# Altium PCB Candunio.PcbDoc
Units mm, origin at the board's own origin, x right, y up, seen from the top; angles counter-clockwise.
Board outline 40 x 28.6 mm, 2 copper layers (Top Layer, Bottom Layer); 45 components, 54 nets, 213 pads, 106 vias.
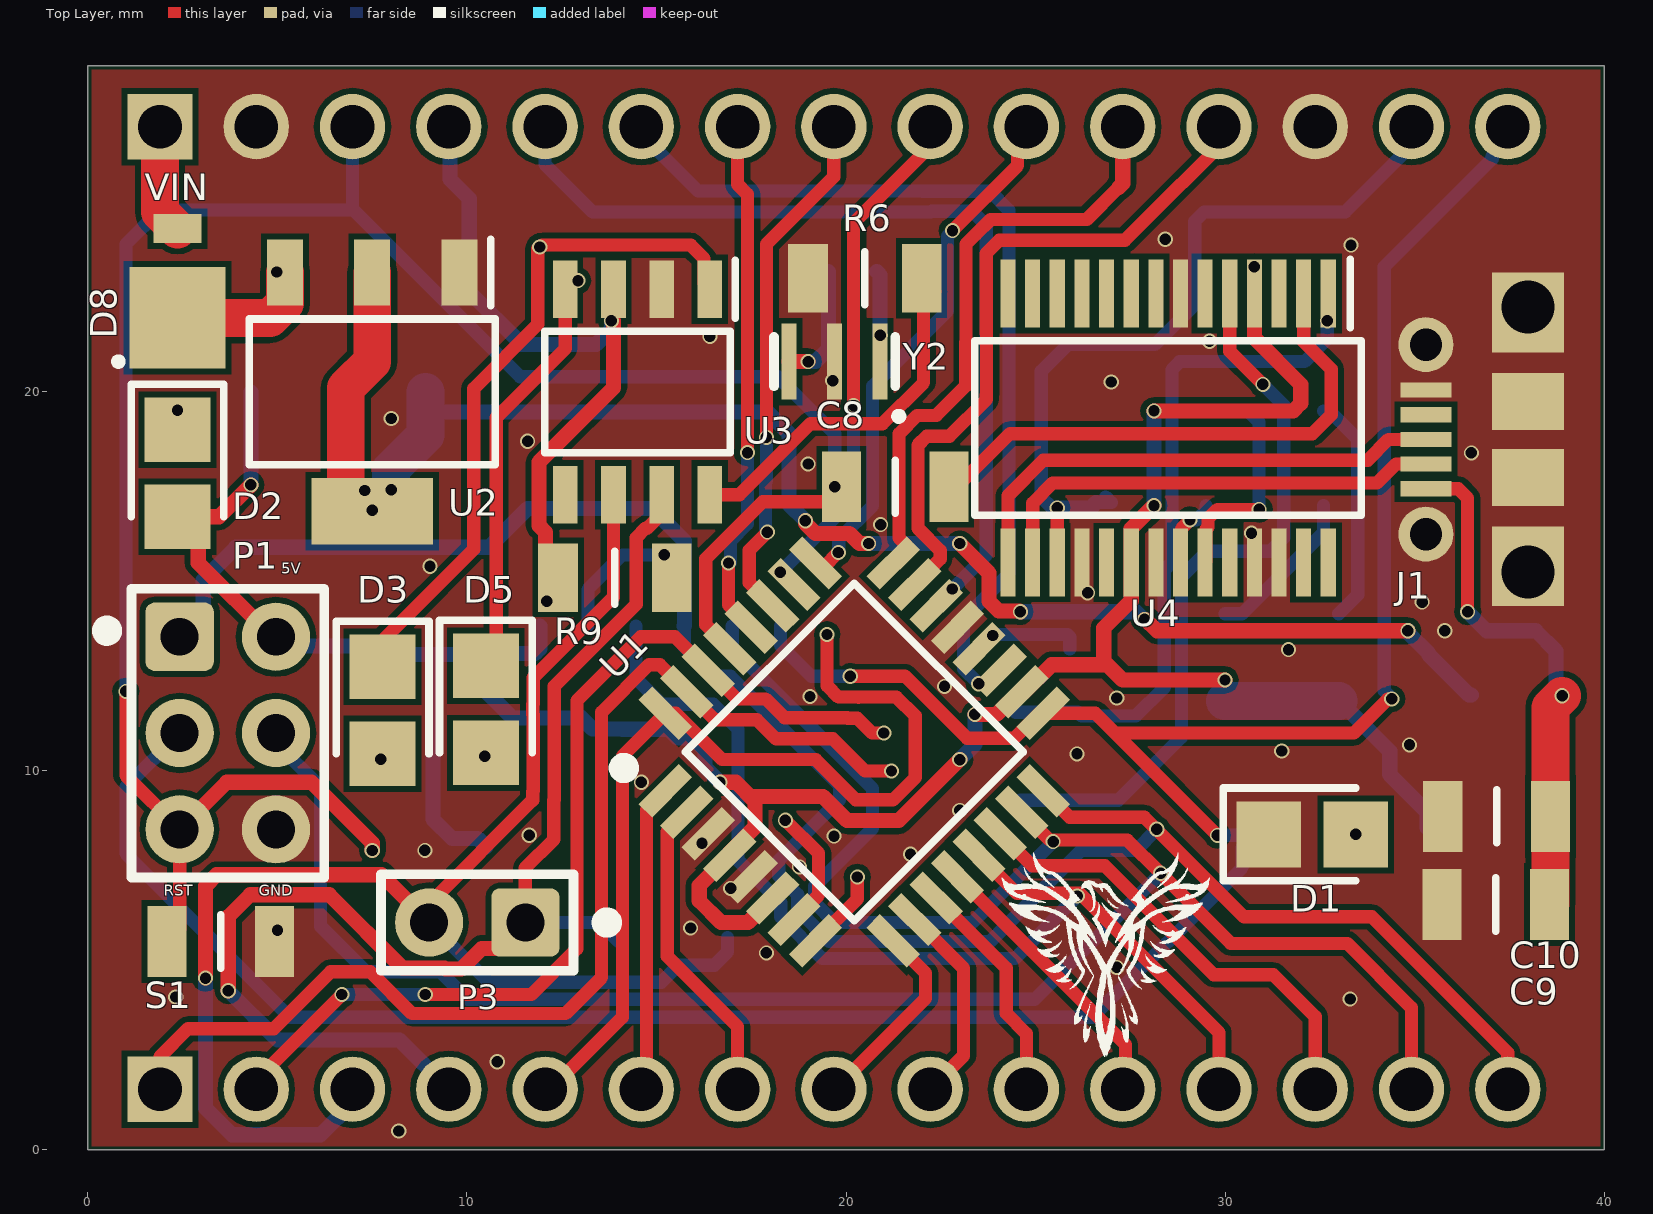
[diagram p0: Top Layer view]
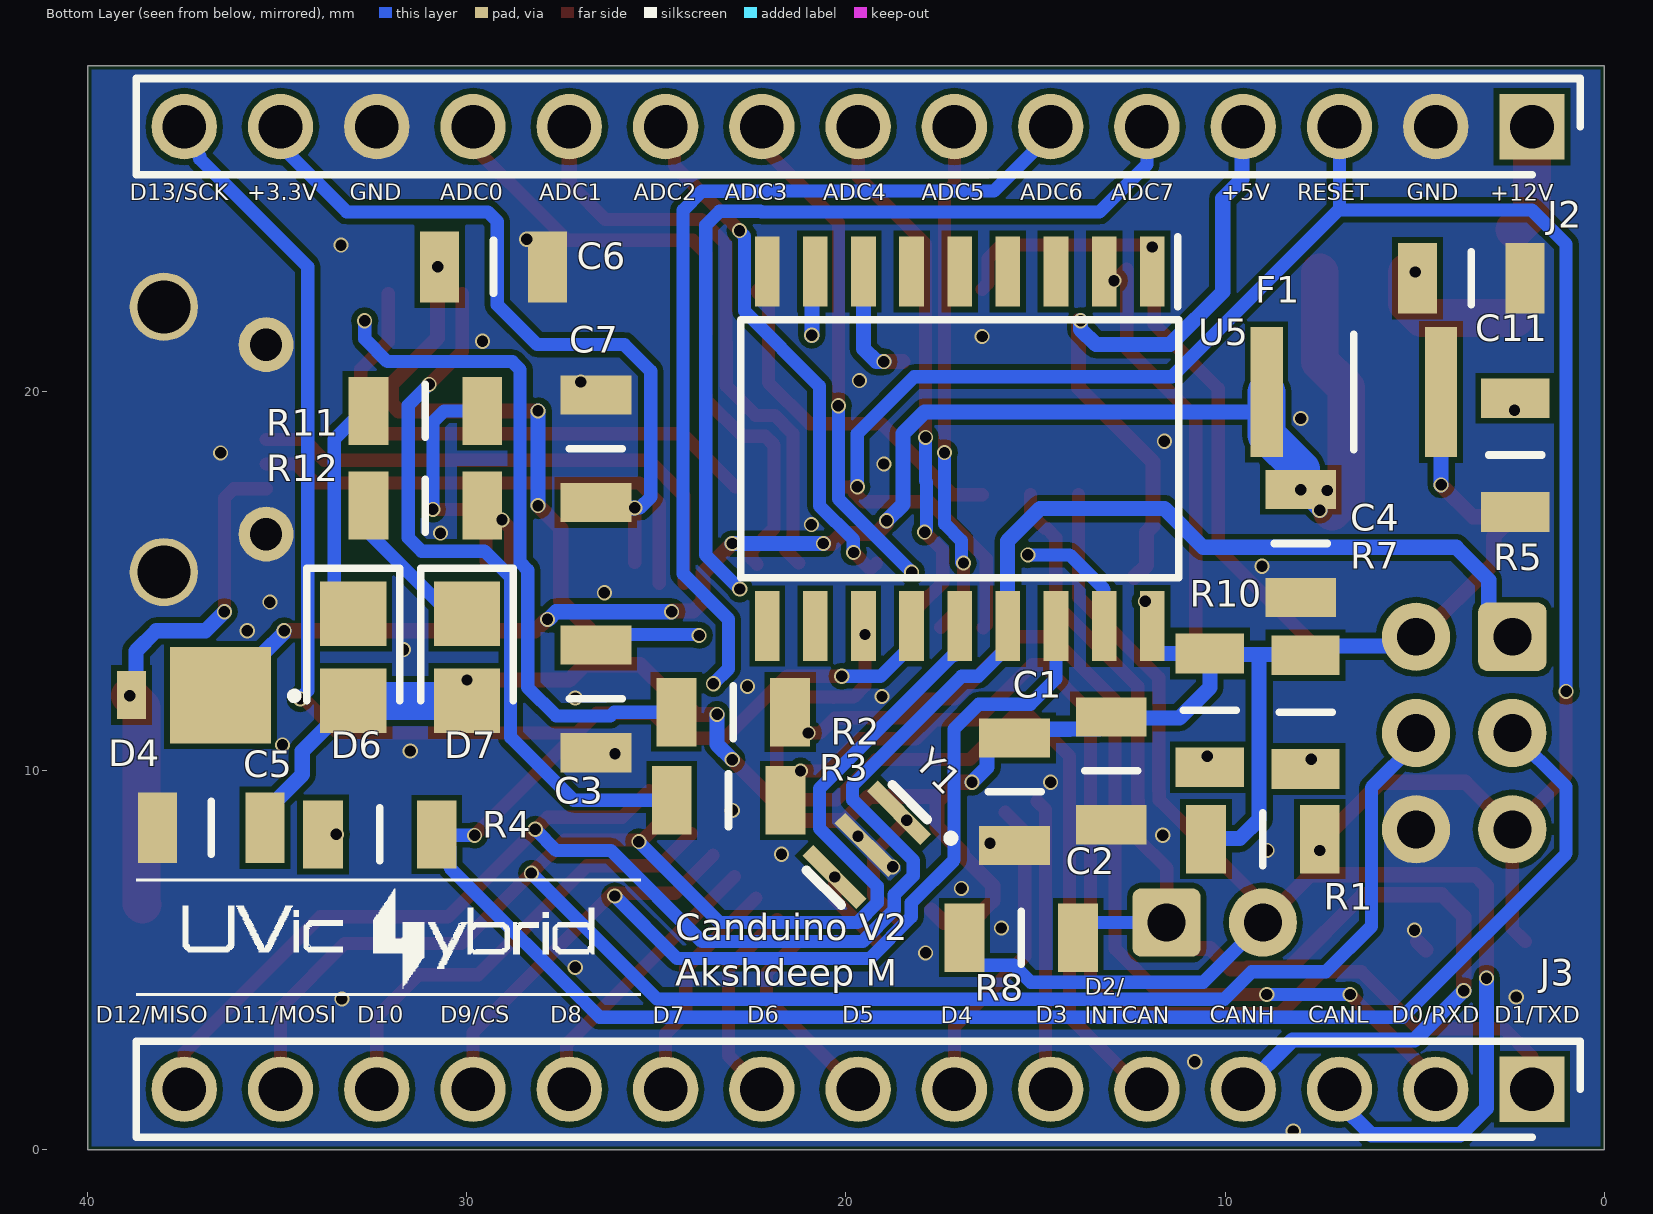
[diagram p1: Bottom Layer view, seen from below]

## Layer stack, top to bottom
Top Solder: solder mask 0.0102, Solder Resist, Dk 3.5
Top Layer: signal copper 0.0356
Dielectric 1: dielectric 0.32, FR-4, Dk 4.8
Bottom Layer: signal copper 0.0356
Bottom Solder: solder mask 0.0102, Solder Resist, Dk 3.5

## Board outline
0,28.6 40,28.6 40,0 0,0

## Design rules (kind name [scope] priority, off if disabled: settings)
Clearance [All] p1: gap=0.1 ignorepadtopadclearanceinfootprint=FALSE except(0.15: Arc-Poly Track-Poly SMDPad-Poly THPad-Poly Via-Poly Fill-Poly Poly-Poly)
HoleSize [All] p1: absolutevalues=TRUE maxlimit=5 minlimit=0.2 maxpercent=80.000 minpercent=20.000
MinimumSolderMaskSliver [All] p1: minsoldermaskwidth=0.25
PasteMaskExpansion [All] p1: expansion=0.1
PlaneConnect [All] p1: planeconnectstyle=Direct reliefexpansion=0.508 reliefentries=4 reliefconductorwidth=0.254 reliefairgap=0.254
PolygonConnect [All] p1: connectstyle=Direct reliefconductorwidth=0.254 reliefentries=4 polygonreliefangle="90 Angle" airgapwidth=0.1
RoutingVias [All] p1: holewidth=0.3 width=0.5 viastyle="Through Hole" minholewidth=0.3 minwidth=0.5 maxholewidth=0.3 maxwidth=0.5 viatemplateguid#1={B52487AF-FD6F-4CA3-9AE4-4AF043218E9B} viatemplatename#1=v50h30
SilkToSilkClearance [All] p1: silktosilkclearance=0.07
SilkToSolderMaskClearance [IsPad] p1: minsilkscreentomaskgap=0.07 clearancetoexposedcopper=TRUE
SolderMaskExpansion [All] p1: expansion=0 istentingtop=FALSE
Width [All] p1: maxlimit=1 minlimit=0.35 preferedwidth=0.4
24 further rules are at their usual default settings.

## Components (designator, comment, footprint, x,y, rotation, side; value= is the part's Value field where it differs from the comment)
C1 "4.7uF" CAPC3216X170N 15.55,9.45 r270 bottom
C2 "4.7uF" CAPC3216X170N 13,10 r90 bottom
C3 "4.7uF" CAPC3216X170N 26.6,11.9 r90 bottom
C4 "4.7uF" CAPC3216X170N 8,16 r90 bottom
C5 "4.7uF" CAPC3216X170N 36.75,8.5 r180 bottom
C6 "4.7uF" CAPC3216X170N 29.3,23.3 r0 bottom
C7 "4.7uF" CAPC3216X170N 26.6,18.5 r270 bottom
C8 "4.7uF" CAPC3216X170N 21.3,17.5 r180 top
C9 "4.7uF" CAPC3216X170N 37.146,6.475 r0 top
C10 "4.7uF" CAPC3216X170N 37.165,8.8 r0 top
C11 "4.7uF" CAPC3216X170N 3.5,23 r0 bottom
D1 "Red" LEDC3216X120NRED 32.3,8.325 r0 top
D2 "Green" LEDC3216X120NGRN 2.362,17.856 r270 top
D3 "Yellow" LEDC3216X120NYEL 7.773,11.6 r270 top
D4 "Diode" DO-220AA 37.2,12 r0 bottom
D5 "Yellow" LEDC3216X120NYEL 10.5,11.625 r270 top
D6 "Yellow" LEDC3216X120NYEL 33,13 r270 bottom
D7 "Yellow" LEDC3216X120NYEL 30,13 r270 bottom
D8 "Diode" DO-220AA 2.362,22.655 r90 top
F1 "Fuse 2" FUSC4632X85N 6.6,20 r180 bottom
J1 "USB micro B" 1050170001 38,18.747 r90 top
J2 "61301511121" HDRV15W95P0X254_1X15_3810X254X854P 1.9,27 r0 bottom locked
J3 "61301511121" HDRV15W95P0X254_1X15_3810X254X854P 1.9,1.6 r0 bottom locked
P1 "ICSP" "Pin Header 2x3 TH Pitch 2.54mm" 4.96,13.54 r270 top
P3 "CANOUT" "Pin Header 1x2 TH Pitch 2.54mm" 11.54,6 r180 top
R1 "10K" RESC3216X60N 9,8.2 r180 bottom
R2 "10K" RESC3216X60N 22.975,11.55 r0 bottom
R3 "10K" RESC3216X60N 23.1,9.225 r0 bottom
R4 "10K" RESC3216X60N 32.3,8.325 r180 bottom
R5 "10K" RESC3216X60N 2.341,18.335 r270 bottom
R6 "10K" RESC3216X60N 20.5,23 r0 top
R7 "10K" RESC3216X60N 7.873,11.55 r270 bottom
R8 "10K" RESC3216X60N 15.375,5.6 r0 bottom
R9 "10K" RESC3216X60N 13.9,15.1 r180 top
R10 "10K" RESC3216X60N 10.4,11.6 r90 bottom
R11 "10K" RESC3216X60N 31.1,19.5 r0 bottom
R12 "10K" RESC3216X60N 31.1,17 r0 bottom
S1 "SW-PB" SMDswitch_1206 3.5,5.5 r0 top
U1 "ATmega328P-AU" QFP80P900X900X120-32N 20.22,10.5 r45 top
U2 "LM1117IMPX-5.0" SOT230P700X180-4N 7.5,20 r270 top
U3 "MCP2551-E/SN" SOIC127P600X175-8N 14.5,20 r270 top
U4 "FT232RL-Reel" SOP65P780X200-28N 28.5,19.05 r270 top
U5 "MCP2515-E/ST" SOIC127P1030X265-18N 17,18.5 r270 bottom
Y1 "CSTCE16M0V53-R0" CSTCE_G 19.451,8.049 r135 bottom
Y2 "CSTCE16M0V53-R0" CSTCE_G 19.7,20.8 r0 top

## Footprints (in the part's own frame and the unit in brackets; to place one, negate y for a bottom-side part, rotate by r counter-clockwise, add the part's x,y. Pads: shape width x height; smd on the part's side, far side on the other; paste and mask are expansions set on the pad)
1050170001 [mm] "CONN USB MICRO MOLEX MODIFIED FOR DRILL HITS"
  round 1.8 hole 1.4: 0(-3.5,0) 0(3.5,0)
  rect 2.1x1.9 smd: 0(-3.35,0) 0(3.35,0)
  round 1.45 hole 0.85: 0(-2.5,2.7) 0(2.5,2.7)
  rect 1.5x1.9 smd: 0(-1,0) 0(1,0)
  rect 0.4x1.35 smd: 1(-1.3,2.7) 2(-0.65,2.7) 3(0,2.7) 4(0.65,2.7) 5(1.3,2.7)
  body extent -4.1,-2.5 4.1,2.9, height 2.78
CAPC3216X170N [mm]
  rect 1.03x1.87 smd: 1(-1.42,0) 2(1.42,0)
  silkscreen extent 0,-0.7 0,0.7, body extent -1.6,-0.8 1.6,0.8, height 1.7
CSTCE_G [mm]
  rect 0.4x2 smd: 1(1.2,0) 2(0,0) 3(-1.2,0)
  silkscreen extent -1.6,-1.52 1.77,0.65, body extent -1.6,-0.65 1.6,0.65, height 0.7
DO-220AA [mil]
  rect 30x50 smd: 1(65.06,0)
  rect 105.12x100 smd: 2(-27.5,0)
  silkscreen extent -107,-2 -102,3, body extent -76,-40 76,40, height 39
FUSC4632X85N [mm]
  rect 0.85x3.43 smd: 1(-2.3,0) 2(2.3,0)
  silkscreen extent 0,-1.52 0,1.52, body extent -2.54,-3.2 2.53,1.65, height 0.54
HDRV15W95P0X254_1X15_3810X254X854P [mm]
  rect 1.725x1.725 hole 1.15: 1(0,0)
  round 1.725 hole 1.15: 2(2.54,0) 3(5.08,0) 4(7.62,0) 5(10.16,0) 6(12.7,0) 7(15.24,0) 8(17.78,0) 9(20.32,0) 10(22.86,0) 11(25.4,0) 12(27.94,0) 13(30.48,0) 14(33.02,0) 15(35.56,0)
  silkscreen extent -1.27,-1.27 36.83,1.27, body extent -1.27,-1.27 36.83,1.27, height 8.54
LEDC3216X120NGRN [mm]
  rect 1.7x1.75 smd: 1(-1.15,0) 2(1.15,0)
  silkscreen extent -2.35,-1.22 1.15,1.22, body extent -1.6,-0.8 1.6,0.8, height 1.1
LEDC3216X120NRED [mm]
  rect 1.7x1.75 smd: 1(-1.15,0) 2(1.15,0)
  silkscreen extent -2.35,-1.22 1.15,1.22, body extent -1.6,-0.8 1.6,0.8, height 1.1
LEDC3216X120NYEL [mm]
  rect 1.7x1.75 smd: 1(-1.15,0) 2(1.15,0)
  silkscreen extent -2.35,-1.22 1.15,1.22, body extent -1.6,-0.8 1.6,0.8, height 1.1
"Pin Header 1x2 TH Pitch 2.54mm" [mm] "PinHeader 1x2 TH Pitch 2.54mm"
  rrect25% 1.8x1.8 hole 1: 1(0,0)
  round 1.8 hole 1: 2(2.54,0)
  silkscreen extent -2.3,-1.27 3.81,1.27, body extent -1.27,-1.27 3.81,1.27, height 9.5
"Pin Header 2x3 TH Pitch 2.54mm" [mm] "PinHeader 1x3 TH Pitch 2.54mm"
  rrect25% 1.8x1.8 hole 1: 1(0,-2.54)
  round 1.8 hole 1: 2(2.54,-2.54) 3(5.08,-2.54) 4(0,0) 5(2.54,0) 6(5.08,0)
  silkscreen extent -1.27,-4.61 6.35,1.27, body extent -1.27,-3.81 6.35,1.27, height 9.5
QFP80P900X900X120-32N [mm]
  rect 1.5x0.5 smd: 1(-4.25,2.8) 2(-4.25,2) 3(-4.25,1.2) 4(-4.25,0.4) 5(-4.25,-0.4) 6(-4.25,-1.2) 7(-4.25,-2) 8(-4.25,-2.8) 17(4.25,-2.8) 18(4.25,-2) 19(4.25,-1.2) 20(4.25,-0.4) 21(4.25,0.4) 22(4.25,1.2) 23(4.25,2) 24(4.25,2.8)
  rect 0.5x1.5 smd: 9(-2.8,-4.25) 10(-2,-4.25) 11(-1.2,-4.25) 12(-0.4,-4.25) 13(0.4,-4.25) 14(1.2,-4.25) 15(2,-4.25) 16(2.8,-4.25) 25(2.8,4.25) 26(2,4.25) 27(1.2,4.25) 28(0.4,4.25) 29(-0.4,4.25) 30(-1.2,4.25) 31(-2,4.25) 32(-2.8,4.25)
  silkscreen extent -4.8,-3.15 3.15,4.2, body extent -4.5,-4.5 4.5,4.5, height 1.2
RESC3216X60N [mm]
  rect 1.05x1.8 smd: 1(-1.5,0) 2(1.5,0)
  silkscreen extent 0,-0.7 0,0.7, body extent -1.57,-0.83 1.58,0.77, height 1.2
SMDswitch_1206 [mm]
  rect 1.03x1.87 smd: 1(-1.42,0) 2(1.42,0)
  silkscreen extent 0,-0.7 0,0.7, body extent -1.53,-0.81 1.53,0.81, height 0.46
SOIC127P600X175-8N [mm]
  rect 1.525x0.65 smd: 1(-2.712,1.905) 2(-2.712,0.635) 3(-2.712,-0.635) 4(-2.712,-1.905) 5(2.712,-1.905) 6(2.712,-0.635) 7(2.712,0.635) 8(2.712,1.905)
  silkscreen extent -3.47,-2.45 1.6,2.58, body extent -3,-2.45 3,2.45, height 1.75
SOIC127P1030X265-18N [mm]
  rect 1.85x0.65 smd: 1(-4.675,5.08) 2(-4.675,3.81) 3(-4.675,2.54) 4(-4.675,1.27) 5(-4.675,0) 6(-4.675,-1.27) 7(-4.675,-2.54) 8(-4.675,-3.81) 9(-4.675,-5.08) 10(4.675,-5.08) 11(4.675,-3.81) 12(4.675,-2.54) 13(4.675,-1.27) 14(4.675,0) 15(4.675,1.27) 16(4.675,2.54) 17(4.675,3.81) 18(4.675,5.08)
  silkscreen extent -5.6,-5.77 3.4,5.77, body extent -5.15,-5.77 5.15,5.78, height 2.65
SOP65P780X200-28N [mm]
  rect 1.8x0.4 smd: 1(-3.55,4.225) 2(-3.55,3.575) 3(-3.55,2.925) 4(-3.55,2.275) 5(-3.55,1.625) 6(-3.55,0.975) 7(-3.55,0.325) 8(-3.55,-0.325) 9(-3.55,-0.975) 10(-3.55,-1.625) 11(-3.55,-2.275) 12(-3.55,-2.925) 13(-3.55,-3.575) 14(-3.55,-4.225) 15(3.55,-4.225) 16(3.55,-3.575) 17(3.55,-2.925) 18(3.55,-2.275) 19(3.55,-1.625) 20(3.55,-0.975) 21(3.55,-0.325) 22(3.55,0.325) 23(3.55,0.975) 24(3.55,1.625) 25(3.55,2.275) 26(3.55,2.925) 27(3.55,3.575) 28(3.55,4.225)
  silkscreen extent -4.45,-5.1 2.3,5.1, body extent -3.9,-5.1 3.9,5.1, height 2
SOT230P700X180-4N [mm]
  rect 1.75x0.95 smd: 1(-3.15,2.3) 2(-3.15,0) 3(-3.15,-2.3)
  rect 1.75x3.2 smd: 4(3.15,0)
  silkscreen extent -4.03,-3.25 1.92,3.25, body extent -3.64,-3.35 3.65,3.35, height 1.81

## Part data
C1 C2 C3 C4 C5 C6 C7 C8 C9 C10 C11: library part "Cap Semi", "Capacitor (Semiconductor SIM Model)", Capacitance=1uF, Case/Package=1206, Case Code (Metric)=3216, Dielectric=X7R, Manufacturer=Murata, Manufacturer Part Number=GRM31MR71H105KA88L, Max Operating Temperature=125°C, Min Operating Temperature=-55°C, Package Quantity=1, Supplier Part Number=1276-1055-1-ND, Tolerance=10%, Voltage=50V, Case Code (Imperial)=1206, ComponentLink1Description=https://datasheet.ciiva.com/16379/product-16379616.pdf, ComponentLink1URL=https://datasheet.ciiva.com/16379/product-16379616.pdf, ComponentLink2Description=https://datasheet.ciiva.com/14116/nmgrm-data-en-14116709.pdf, ComponentLink2URL=https://datasheet.ciiva.com/14116/nmgrm-data-en-14116709.pdf, ComponentLink3Description=https://datasheet.ciiva.com/22703/608985-22703384.pdf, ComponentLink3URL=https://datasheet.ciiva.com/22703/608985-22703384.pdf, ComponentLink4Description=https://datasheet.ciiva.com/3777/42grm31mr71h105ka8823-3777081.pdf, ComponentLink4URL=https://datasheet.ciiva.com/3777/42grm31mr71h105ka8823-3777081.pdf, ComponentLink5Description=https://datasheet.ciiva.com/6270/partnumbering-e-01-6270398.pdf, ComponentLink5URL=https://datasheet.ciiva.com/6270/partnumbering-e-01-6270398.pdf, ComponentLink6Description=https://datasheet.ciiva.com/6270/partnumbering-e-01-6270399.pdf, ComponentLink6URL=https://datasheet.ciiva.com/6270/partnumbering-e-01-6270399.pdf, ComponentLink7Description=https://datasheet.ciiva.com/29199/455056-da-01-en-vs-kondensator-1206-29199449.pdf, ComponentLink7URL=https://datasheet.ciiva.com/29199/455056-da-01-en-vs-kondensator-1206-29199449.pdf, ComponentLink8Description=https://datasheet.ciiva.com/29202/450923-da-01-de-vs-chip-kond-1206-1-0-uf-10pr-50-0v-x7r-29202718.pdf, ComponentLink8URL=https://datasheet.ciiva.com/29202/450923-da-01-de-vs-chip-kond-1206-1-0-uf-10pr-50-0v-x7r-29202718.pdf, Depth=1.6mm, Height=1.15mm, LatestRevisionDate=29-May-2009, LatestRevisionNote="IPC-7351 Footprint Added.", Lead Free="Lead Free", Length=3.2mm, Material=Ceramic, Mount="Surface Mount", Number of Pins=2, PackageDescription="Chip Capacitor", PackageReference=C1206, Packaging="Tape and Reel", Published=8-Jun-2000, Publisher="Altium Limited", REACH SVHC="No SVHC", Stock 1=0, Supplier 1=Digi-Key, Supplier 2=Digi-Key, Termination=SMD/SMT, Thickness=0.049inch, Voltage Rating=50V, Voltage Rating (DC)=50V, Width=0.063inch
D1: library part LED2_2, "Typical RED, GREEN, YELLOW, AMBER GaAs LED", Case/Package=1206, Case Code (Metric)=3216, Colour=Yellow, Forward Current=20mA, Forward Voltage=2.1V, Lens Colour=White,Clear, Manufacturer="Broadcom Avago", Manufacturer Part Number=HSMY-C150, Max Operating Temperature=85°C, Max Power Dissipation=65mW, Min Operating Temperature=-40°C, Package Quantity=1, Reverse Voltage=5V, Supplier Part Number=732-4992-1-ND, Case Code (Imperial)=1206, ComponentLink1Description=https://datasheet.ciiva.com/15117/getdatasheetpartid-110528-15117488.pdf, ComponentLink1URL=https://datasheet.ciiva.com/15117/getdatasheetpartid-110528-15117488.pdf, ComponentLink2Description=https://datasheet.ciiva.com/11774/0900766b804a6539-11774578.pdf, ComponentLink2URL=https://datasheet.ciiva.com/11774/0900766b804a6539-11774578.pdf, ComponentLink3Description=https://datasheet.ciiva.com/19466/1557071-19466435.pdf, ComponentLink3URL=https://datasheet.ciiva.com/19466/1557071-19466435.pdf, ComponentLink4Description=https://datasheet.ciiva.com/14172/swseriehsmx-c150toc190-e-14172159.pdf, ComponentLink4URL=https://datasheet.ciiva.com/14172/swseriehsmx-c150toc190-e-14172159.pdf, ComponentLink5Description=https://datasheet.ciiva.com/29280/180507-da-01-en-chip-led-hsmy-c150-gelb-29280997.pdf, ComponentLink5URL=https://datasheet.ciiva.com/29280/180507-da-01-en-chip-led-hsmy-c150-gelb-29280997.pdf, ComponentLink6Description=https://datasheet.ciiva.com/11773/0900766b804a6539-11773956.pdf, ComponentLink6URL=https://datasheet.ciiva.com/11773/0900766b804a6539-11773956.pdf, ComponentLink7Description=https://datasheet.ciiva.com/15117/getdatasheetpartid-142358-15117749.pdf, ComponentLink7URL=https://datasheet.ciiva.com/15117/getdatasheetpartid-142358-15117749.pdf, ComponentLink8Description=https://datasheet.ciiva.com/46426/313031-46426533.pdf, ComponentLink8URL=https://datasheet.ciiva.com/46426/313031-46426533.pdf, ComponentLink9Description=https://datasheet.ciiva.com/14172/swseriehsmx-c150toc190-e-14172156.pdf, ComponentLink9URL=https://datasheet.ciiva.com/14172/swseriehsmx-c150toc190-e-14172156.pdf, ComponentLink10Description=https://datasheet.ciiva.com/29281/180509-da-01-en-chip-led-hsmh-c150-rot-29281009.pdf, ComponentLink10URL=https://datasheet.ciiva.com/29281/180509-da-01-en-chip-led-hsmh-c150-rot-29281009.pdf, Contact Plating=Gold, Depth=1.6mm, Dominant Wavelength=586nm, Height=1.1mm, Illumination Colour=Yellow, LatestRevisionDate=17-Jul-2002, LatestRevisionNote="Re-released for DXP Platform.", Lead Free="Lead Free", Length=3.2mm, Lens Style=Diffused,Colorless,Rectangular, Lens Transparency=Diffused, Luminous Intensity=8mcd, Mount="Surface Mount", Number of Elements=1, Number of LEDs=1, Number of Pins=2, PackageDescription="SM LED; 2 Flat Leads", PackageReference=3.2X1.6X1.1, PackageVersion=Feb-2002, Packaging="Tape and Reel", Power Dissipation=65mW, Power Rating=65mW, Published=8-Jun-2000, Publisher="Altium Limited", Radiation Hardening=No, REACH SVHC="No SVHC", Stock 1=0, Stock 2=0, Supplier 1=Digi-Key, Supplier 2=Digi-Key, Supplier 3=Digi-Key, Supplier 4=Digi-Key, Test Current=20mA, Viewing Angle=170°, Voltage Rating (DC)=2.1V, Wavelength=586nm, Width=1.6mm
D2: library part LED2, "Typical RED, GREEN, YELLOW, AMBER GaAs LED", Case/Package=1206, Case Code (Metric)=3216, Colour=Green,Yellow, Forward Current=20mA, Forward Voltage=2.2V, Lens Colour=White,Clear, Manufacturer="Broadcom Avago", Manufacturer Part Number=HSMG-C150, Max Operating Temperature=85°C, Max Power Dissipation=65mW, Min Operating Temperature=-30°C, Package Quantity=1, Reverse Voltage=5V, Supplier Part Number=732-4993-1-ND, Case Code (Imperial)=1206, ComponentLink1Description=https://datasheet.ciiva.com/11774/0900766b804a6539-11774272.pdf, ComponentLink1URL=https://datasheet.ciiva.com/11774/0900766b804a6539-11774272.pdf, ComponentLink2Description=https://datasheet.ciiva.com/14172/swseriehsmx-c150toc190-e-14172162.pdf, ComponentLink2URL=https://datasheet.ciiva.com/14172/swseriehsmx-c150toc190-e-14172162.pdf, ComponentLink3Description=https://datasheet.ciiva.com/46426/313031-46426517.pdf, ComponentLink3URL=https://datasheet.ciiva.com/46426/313031-46426517.pdf, ComponentLink4Description=https://datasheet.ciiva.com/15117/getdatasheetpartid-110366-15117482.pdf, ComponentLink4URL=https://datasheet.ciiva.com/15117/getdatasheetpartid-110366-15117482.pdf, ComponentLink5Description=https://datasheet.ciiva.com/19466/1556369-19466015.pdf, ComponentLink5URL=https://datasheet.ciiva.com/19466/1556369-19466015.pdf, ComponentLink6Description=https://datasheet.ciiva.com/29280/180668-da-01-en-chip-led-hsmg-c150-gelb-gruen-29280632.pdf, ComponentLink6URL=https://datasheet.ciiva.com/29280/180668-da-01-en-chip-led-hsmg-c150-gelb-gruen-29280632.pdf, Contact Plating=Gold, Depth=1.6mm, Dominant Wavelength=572nm, Height=1.1mm, Illumination Colour=Green, LatestRevisionDate=17-Jul-2002, LatestRevisionNote="Re-released for DXP Platform.", Length=3.2mm, Lens Style=Diffused,Colorless,Rectangular, Lens Transparency=Diffused, Luminous Intensity=15mcd, Mount="Surface Mount", Number of Elements=1, Number of LEDs=1, Number of Pins=2, PackageDescription="SM LED; 2 Flat Leads", PackageReference=3.2X1.6X1.1, PackageVersion=Feb-2002, Packaging="Tape and Reel", Power Dissipation=65mW, Power Rating=65mW, Published=8-Jun-2000, Publisher="Altium Limited", Radiation Hardening=No, REACH SVHC="No SVHC", Supplier 1=Digi-Key, Supplier 2=Digi-Key, Test Current=20mA, Viewing Angle=170°, Wavelength=572nm, Width=1.6mm
D3 D5 D6 D7: library part LED2_1, "Typical RED, GREEN, YELLOW, AMBER GaAs LED", Case/Package=1206, Case Code (Metric)=3216, Forward Current=20mA, Forward Voltage=2.1V, Lens Colour=White,Clear, Manufacturer="Broadcom Avago", Manufacturer Part Number=HSMY-C150, Max Operating Temperature=85°C, Max Power Dissipation=65mW, Min Operating Temperature=-40°C, Package Quantity=1, Reverse Voltage=5V, Supplier Part Number=732-4994-1-ND, Case Code (Imperial)=1206, Colour=Yellow, ComponentLink1Description=https://datasheet.ciiva.com/15117/getdatasheetpartid-110528-15117488.pdf, ComponentLink1URL=https://datasheet.ciiva.com/15117/getdatasheetpartid-110528-15117488.pdf, ComponentLink2Description=https://datasheet.ciiva.com/11774/0900766b804a6539-11774578.pdf, ComponentLink2URL=https://datasheet.ciiva.com/11774/0900766b804a6539-11774578.pdf, ComponentLink3Description=https://datasheet.ciiva.com/19466/1557071-19466435.pdf, ComponentLink3URL=https://datasheet.ciiva.com/19466/1557071-19466435.pdf, ComponentLink4Description=https://datasheet.ciiva.com/14172/swseriehsmx-c150toc190-e-14172159.pdf, ComponentLink4URL=https://datasheet.ciiva.com/14172/swseriehsmx-c150toc190-e-14172159.pdf, ComponentLink5Description=https://datasheet.ciiva.com/29280/180507-da-01-en-chip-led-hsmy-c150-gelb-29280997.pdf, ComponentLink5URL=https://datasheet.ciiva.com/29280/180507-da-01-en-chip-led-hsmy-c150-gelb-29280997.pdf, Contact Plating=Gold, Depth=1.6mm, Dominant Wavelength=586nm, Height=1.1mm, Illumination Colour=Yellow, LatestRevisionDate=17-Jul-2002, LatestRevisionNote="Re-released for DXP Platform.", Lead Free="Lead Free", Length=3.2mm, Lens Style=Diffused,Colorless,Rectangular, Lens Transparency=Diffused, Luminous Intensity=8mcd, Mount="Surface Mount", Number of Elements=1, Number of LEDs=1, Number of Pins=2, PackageDescription="SM LED; 2 Flat Leads", PackageReference=3.2X1.6X1.1, PackageVersion=Feb-2002, Packaging="Tape and Reel", Power Dissipation=65mW, Power Rating=65mW, Published=8-Jun-2000, Publisher="Altium Limited", Radiation Hardening=No, REACH SVHC="No SVHC", Stock 1=0, Supplier 1=Digi-Key, Supplier 2=Digi-Key, Test Current=20mA, Viewing Angle=170°, Voltage Rating (DC)=2.1V, Wavelength=586nm, Width=1.6mm
D4 D8: "Default Diode", Supplier Part Number=SS1P3L-M3/84AGICT-ND, Code_JEDEC=DO-214-AB, LatestRevisionDate=17-Jul-2002, LatestRevisionNote="Re-released for DXP Platform.", PackageDescription="DO-214-AB/SMC; 2 C-Bend Leads; Body 7.9 x 5.9 mm, inc. leads (LxW)", PackageReference=SMC, PackageVersion=Sep-1996, Published=8-Jun-2000, Publisher="Altium Limited", Supplier 1=Digi-Key, Supplier 2=Digi-Key
F1: "Fuse", Case Code (Imperial)=1812, Case Code (Metric)=4532, Current Rating=100A, Hold Current=500mA, Manufacturer=Bourns, Manufacturer Part Number=MF-MSMF050-2, Max Operating Temperature=85°C, Min Operating Temperature=-40°C, Operating Supply Voltage=15V, Package Quantity=2000, Power Dissipation=800mW, Resistance=150mR, Supplier Part Number=‎MF-MSMF050-2CT-ND, Trip Current=1A, Approvals=UL,CSA,TUV, Case/Package=1812, ComponentLink10Description=https://datasheet.ciiva.com/3019/mfmsmf-3019622.pdf, ComponentLink10URL=https://datasheet.ciiva.com/3019/mfmsmf-3019622.pdf, ComponentLink11Description=https://datasheet.ciiva.com/3019/mfmsmf-3019621.pdf, ComponentLink11URL=https://datasheet.ciiva.com/3019/mfmsmf-3019621.pdf, ComponentLink12Description=https://datasheet.ciiva.com/326/mfmsmf-326356.pdf, ComponentLink12URL=https://datasheet.ciiva.com/326/mfmsmf-326356.pdf, ComponentLink13Description=https://datasheet.ciiva.com/1274/1786007-1274499.pdf, ComponentLink13URL=https://datasheet.ciiva.com/1274/1786007-1274499.pdf, ComponentLink14Description=https://datasheet.ciiva.com/326/mfmsmf-326355.pdf, ComponentLink14URL=https://datasheet.ciiva.com/326/mfmsmf-326355.pdf, ComponentLink15Description=https://datasheet.ciiva.com/1274/1786007-1274498.pdf, ComponentLink15URL=https://datasheet.ciiva.com/1274/1786007-1274498.pdf, ComponentLink16Description=https://datasheet.ciiva.com/15226/getdatasheetpartid-117168-15226886.pdf, ComponentLink16URL=https://datasheet.ciiva.com/15226/getdatasheetpartid-117168-15226886.pdf, ComponentLink17Description=https://datasheet.ciiva.com/25894/mfmsmf-25894175.pdf, ComponentLink17URL=https://datasheet.ciiva.com/25894/mfmsmf-25894175.pdf, ComponentLink1Description=https://datasheet.ciiva.com/326/mfmsmf-326354.pdf, ComponentLink1URL=https://datasheet.ciiva.com/326/mfmsmf-326354.pdf, ComponentLink2Description=https://datasheet.ciiva.com/1228/1786007-1228155.pdf, ComponentLink2URL=https://datasheet.ciiva.com/1228/1786007-1228155.pdf, ComponentLink3Description=https://datasheet.ciiva.com/16205/mfmsmf-16205994.pdf, ComponentLink3URL=https://datasheet.ciiva.com/16205/mfmsmf-16205994.pdf, ComponentLink4Description=https://datasheet.ciiva.com/34302/1164200-34302041.pdf, ComponentLink4URL=https://datasheet.ciiva.com/34302/1164200-34302041.pdf, ComponentLink5Description=https://datasheet.ciiva.com/14537/70153434-14537737.pdf, ComponentLink5URL=https://datasheet.ciiva.com/14537/70153434-14537737.pdf, ComponentLink6Description=https://datasheet.ciiva.com/46395/1695373-46395287.pdf, ComponentLink6URL=https://datasheet.ciiva.com/46395/1695373-46395287.pdf, ComponentLink7Description=https://datasheet.ciiva.com/22749/1695373-22749079.pdf, ComponentLink7URL=https://datasheet.ciiva.com/22749/1695373-22749079.pdf, ComponentLink8Description=https://datasheet.ciiva.com/32426/mf-msmf-series-eng-tds-32426126.pdf, ComponentLink8URL=https://datasheet.ciiva.com/32426/mf-msmf-series-eng-tds-32426126.pdf, ComponentLink9Description=https://datasheet.ciiva.com/4501/mfmsmf-72300-4501655.pdf, ComponentLink9URL=https://datasheet.ciiva.com/4501/mfmsmf-72300-4501655.pdf, Contact Plating=Gold, Height=0.85mm, LatestRevisionDate=17-Jul-2002, LatestRevisionNote="Re-released for DXP Platform.", Lead Free="Lead Free", Length=4.73mm, Max Current Rating=100A, Mount="Surface Mount,PCB", Number of Terminals=2, PackageDescription="Thru-Hole; 2 Leads", PackageReference=PIN-W2/E2.8, Packaging="Tape and Reel", Part number=MF-MSMF050-2, Pricing 1="2000=0.2898, 4000=0.28463, 6000=0.27945, 10000=0.2691 (USD)", Published=8-Jun-2000, Publisher="Altium Limited", Radiation Hardening=No, REACH SVHC="No SVHC", Stock 1=126000, Supplier 1=Digi-Key, Terminal Material=Gold, Termination=SMD/SMT, Time to Trip=0.15s, Voltage Rating=15V, Voltage Rating (DC)=15V, Width=3.41mm
J1: library part 1050170001, "CONN SM TH USB MICRO MODIFIED FOR DRILL", Part number=WM1399CT-ND, Supplier Part Number=609-4618-1-ND, Details="Modified from reference footprint for standard drill hits (rather than slots)", Supplier 1=Digi-Key
J2 J3: "Connector", Manufacturer_Name="Wurth Elektronik", Mouser Part Number=710-61301511121, RS Part Number=8281623P, Datasheet Link=http://docs-emea.rs-online.com/webdocs/1346/0900766b81346518.pdf, Height=8.54mm, Manufacturer_Part_Number=61301511121, Mouser Price/Stock=https://www.mouser.com/Search/Refine.aspx?Keyword=710-61301511121, RS Price/Stock=http://uk.rs-online.com/web/p/products/8281623P
P1: library part "Header 3X2A", "Header, 3-Pin, Dual row", LatestRevisionDate=17-Jul-2002, LatestRevisionNote="Re-released for DXP Platform.", Publisher="Altium Limited"
P3: library part "Header 2", "Header, 2-Pin", LatestRevisionDate=17-Jul-2002, LatestRevisionNote="Re-released for DXP Platform.", Publisher="Altium Limited"
R1 R2 R3 R4 R5 R6 R7 R8 R9 R10 R11 R12: library part Res1, "Resistor", Case/Package=1206, Case Code (Metric)=3216, Manufacturer="Stackpole Electronics", Manufacturer Part Number=RNCP1206FTD1K00, Max Operating Temperature=155°C, Max Power Dissipation=500mW, Min Operating Temperature=-55°C, Resistance=10kR, Supplier Part Number=RNCP1206FTD10K0CT-ND, Temperature Coefficient=100ppm/°C, Tolerance=1%, Case Code (Imperial)=1206, ComponentLink1Description=http://www.seielect.com/Catalog/SEI-rncp.pdf, ComponentLink1URL=http://www.seielect.com/Catalog/SEI-rncp.pdf, ComponentLink2Description=https://www.seielect.com/catalog/SEI-Packaging.pdf, ComponentLink2URL=https://www.seielect.com/catalog/SEI-Packaging.pdf, Composition="Thin Film", Contact Plating=Nickel,Tin,Matte, Height=0.024inch, Lead Free="Lead Free", Length=0.122inch, Mount="Surface Mount", Number of Terminations=2, Packaging="Tape and Reel", Pricing 1="1=0.1, 10=0.052, 100=0.0211, 1000=0.00949, 2500=0.00824 (USD)", Radiation Hardening=No, Stock 1=679, Supplier 1=Digi-Key, Width=0.059inch
S1: "Switch", Manufacturer="ITT C&K", Manufacturer Part Number=KXT331LHS, Supplier Part Number=CKN10779CT-ND, ComponentLink1Description=https://www.ckswitches.com/media/1465/kxt3.pdf, ComponentLink1URL=https://www.ckswitches.com/media/1465/kxt3.pdf, ComponentLink2Description=http://www.ckswitches.com/media/1465/kxt3.pdf, ComponentLink2URL=http://www.ckswitches.com/media/1465/kxt3.pdf, LatestRevisionDate=17-Jul-2002, LatestRevisionNote="Re-released for DXP Platform.", PackageDescription="Switch; 2 Leads", PackageReference=SPST-2, Pricing 1="8500=0.1264 (USD)", Published=24-Mar-1999, Publisher="Altium Limited", Stock 1=42500, Supplier 1=Digi-Key
U1: "8-bit AVR Microcontroller, 32KB Flash, 1KB EEPROM, 2KB SRAM, 32-pin TQFP, Industrial Grade (-40°C to 85°C)", Supplier Part Number=ATMEGA328P-AU-ND, Code_JEDEC=MS-026-ABA, ComponentLink1Description="Manufacturer Link", ComponentLink1URL=http://www.atmel.com/products/avr/default.asp?, ComponentLink2Description="ATmega48A/48PA/88A/88PA/168A/168PA/328/328P Datasheet", ComponentLink2URL=http://www.atmel.com/dyn/resources/prod_documents/8271.pdf, ComponentLink3Description="ATmega48A/48PA/88A/88PA/168A/168PA/328/328P Summary", ComponentLink3URL=http://www.atmel.com/dyn/resources/prod_documents/8271S.pdf, ComponentLink4Description="Atmel.com Home", ComponentLink4URL=http://www.atmel.com, DatasheetVersion="revA, Jan-2010", PackageDescription="32-Lead, 7x7x1.0 mm Body, 0.8mm Lead Pitch, Thin Profile Plastic Quad Flat Package (TQFP)", PackageReference=32A, PackageVersion="revB, Oct-2001", Published=1-Apr-2010, Publisher="Altium Limited", Supplier 1=Digi-Key, Supplier 2=Farnell, Supplier 3=Mouser, Supplier Part Number 2=1715486, Supplier Part Number 3=556-ATMEGA328P-AU
U2: "800mA Low-Dropout Linear Regulator, 4-pin SOT-223", Manufacturer="National Semiconductor", PackageTopMarking=XYTT*N06B, PartNumber=LM1117IMPX-5.0/NOPBCT-ND, PowerWise=N, Supplier Part Number=296-21114-1-ND, Code_IPC=SOT223-4, Code_JEDEC=TO-261-AA, ComponentLink1Description="LM1117 Datasheet", ComponentLink1URL=http://www.national.com/ds/LM/LM1117.pdf, ComponentLink2Description="LM1117 Web Page", ComponentLink2URL=http://www.national.com/pf/LM/LM1117.html, ComponentLink3Description="MP04A Package Page", ComponentLink3URL=http://www.national.com/packaging/folders/mp04a.html, CompType="LDO IC", DatasheetVersion=Apr-2006, PackageDescription="Molded SOT-223, 6.50 x 3.56 x 1.6mm Body, 4 Lead, 2.3mm Pitch", PackageReference=MP04A, PackageVersion="revB, Apr-2003", PinCount=4, Published=1-Mar-2010, Publisher="Altium Limited", RoHS=N, Supplier 1=Digi-Key
U3: "SOIC", Supplier Part Number=MCP2551T-E/SNCT-ND, Supplier 1=Digi-Key
U4: "USB UART Asynchronous Serial Data Transfer Chip, SSOP-28, Tape and Reel", Case/Package=SSOP, Manufacturer=FTDI, Manufacturer Part Number=FT232RL-REEL, Max Operating Temperature=85°C, Max Supply Voltage=5.25V, Min Operating Temperature=-40°C, Min Supply Voltage=3.3V, Operating Supply Current=15mA, Package Quantity=2000, Supplier Part Number=768-1007-1-ND, Voltage=5V, ComponentLink1Description="Manufacturer Link", ComponentLink1URL=http://www.ftdichip.com/Products/ICs/FT232R.htm, ComponentLink2Description=Datasheet, ComponentLink2URL=http://www.ftdichip.com/Support/Documents/DataSheets/ICs/DS_FT232R.pdf, ComponentLink3Description=https://datasheet.ciiva.com/34304/2161019-34304054.pdf, ComponentLink3URL=https://datasheet.ciiva.com/34304/2161019-34304054.pdf, ComponentLink4Description=https://datasheet.ciiva.com/1787/ds-ft232r-1787047.pdf, ComponentLink4URL=https://datasheet.ciiva.com/1787/ds-ft232r-1787047.pdf, ComponentLink5Description=https://datasheet.ciiva.com/1787/ds-ft232r-1787048.pdf, ComponentLink5URL=https://datasheet.ciiva.com/1787/ds-ft232r-1787048.pdf, ComponentLink6Description=https://datasheet.ciiva.com/1787/ds-ft232r-1787049.pdf, ComponentLink6URL=https://datasheet.ciiva.com/1787/ds-ft232r-1787049.pdf, ComponentLink7Description=https://datasheet.ciiva.com/4787/ds-ft232r-11534-4787658.pdf, ComponentLink7URL=https://datasheet.ciiva.com/4787/ds-ft232r-11534-4787658.pdf, ComponentLink8Description=https://datasheet.ciiva.com/15150/getdatasheetpartid-643207-15150506.pdf, ComponentLink8URL=https://datasheet.ciiva.com/15150/getdatasheetpartid-643207-15150506.pdf, ComponentLink9Description=https://datasheet.ciiva.com/16200/ds-ft232r-16200652.pdf, ComponentLink9URL=https://datasheet.ciiva.com/16200/ds-ft232r-16200652.pdf, ComponentLink10Description=https://datasheet.ciiva.com/26841/ft232rl-reel-26841080.pdf, ComponentLink10URL=https://datasheet.ciiva.com/26841/ft232rl-reel-26841080.pdf, Data Rate=12Mbps, DatasheetVersion="ver 2.07, Jul-2010", Height=1.75mm, Interface=RS-232,RS-422,RS-485,UART, Lead Free="Lead Free", Length=10.2mm, Mount="Surface Mount", Number of Channels=1, Number of Pins=28, Number of Transceivers=1, PackageDescription="28-Pin Small Outline Package 0.65 mm Pitch", PackageReference=SSOP-28, PackageVersion=2010, Packaging="Tape and Reel", Pricing 1="1=4.5, 10=4.05, 100=3.65, 250=3.25, 500=2.85002, 1000=2.65 (USD)", Published=19-Aug-2010, Publisher="Altium Limited", Radiation Hardening=No, REACH SVHC="No SVHC", Stock 1=216496, Supplier 1=Digi-Key, Supplier 2=Digi-Key, Weight=0.080001oz, Width=5.3mm
U5: "SOIC", Supplier Part Number=MCP2515T-I/SOCT-ND, Supplier 1=Digi-Key
Y1 Y2: Capacitance=15pF, Case/Package=SMD/SMT, Frequency=16MHz, Frequency Stability=0.15%, Frequency Tolerance=0.5%, Manufacturer=Murata, Manufacturer Part Number=CSTCE16M0V53C-R0, Max Operating Temperature=125°C, Min Operating Temperature=-40°C, Package Quantity=3000, Supplier Part Number=490-17948-1-ND, ComponentLink1Description=https://datasheet.ciiva.com/16430/cstce16m0v53c-r0-16430704.pdf, ComponentLink1URL=https://datasheet.ciiva.com/16430/cstce16m0v53c-r0-16430704.pdf, ComponentLink2Description=https://datasheet.ciiva.com/14132/ceralock-eng-bro-14132709.pdf, ComponentLink2URL=https://datasheet.ciiva.com/14132/ceralock-eng-bro-14132709.pdf, ComponentLink3Description=https://datasheet.ciiva.com/29617/l0430e-29617948.pdf, ComponentLink3URL=https://datasheet.ciiva.com/29617/l0430e-29617948.pdf, ComponentLink4Description=https://datasheet.ciiva.com/29617/l0430e-29617949.pdf, ComponentLink4URL=https://datasheet.ciiva.com/29617/l0430e-29617949.pdf, ComponentLink5Description=https://datasheet.ciiva.com/29617/l0430e-29617950.pdf, ComponentLink5URL=https://datasheet.ciiva.com/29617/l0430e-29617950.pdf, ComponentLink6Description=https://datasheet.ciiva.com/26812/getdatasheetpartid-418508-26812063.pdf, ComponentLink6URL=https://datasheet.ciiva.com/26812/getdatasheetpartid-418508-26812063.pdf, Composition=Ceramic, Contact Plating=Gold, Height=0.031inch, Lead Free="Lead Free", Length=0.126inch, Mount="Surface Mount", Number of Pins=3, Packaging="Tape and Reel", REACH SVHC="No SVHC", Stock 1=0, Supplier 1=Digi-Key, Termination=SMD/SMT, Tolerance=0.5%, Width=0.051inch

## Via types
v1: diameter 0.4, hole 0.3, Top Layer to Bottom Layer, tented both sides, 106 vias

## Nets (pads, with @x,y where several pads share a name; then routed paths per layer and width w, separated by ;. In a path a pad name is that pad's centre, name@x,y a point inside that pad or via, vN(x,y) a via of type N, cw(c..) or ccw(c..) an arc to the next point about the centre after c; other vN are vias at no path point)
+3.3V: C7.2 J2.14 U4.17 | length 21.2
  Top Layer w0.35: U4.17 v1(25.575,16.94)
  Bottom Layer w0.35: v1(25.575,16.94) 25.435,16.94 25.15,17.225 25.15,20.55 25.85,21.25 28.15,21.25 29.2,22.3 29.2,24.5 29.45,24.75 33.172,24.75 J2.14@35.419,26.997 ; C7.2 27,17.08 C7.2@26.849,17.231
  Bottom Layer w0.4: v1(25.575,16.94) 26.46,16.94 C7.2
+5V: C1.1 C2.2 C5.2 C6.2 D2.2 D6.2 D7.2 F1.2 J2.4 P1.4 R1.1 R7.1 R9.2 R10.2 U1.4 U1.6 U1.18 U3.3 U4.4 U4.20 U5.18 | length 91.8
  Top Layer w0.35: U1.18@24.32,11.771 U1.18
  Top Layer w0.4: D2.2 3.457,16.706 v1(4.298,17.547) ; D2.2@2.431,16.662 2.909,16.184 2.909,15.491 4.86,13.54 P1.4 ; R9.2 12.075,15.425 12.075,16.296 11.9,16.471 11.9,18.147 13.865,20.112 v1@13.865,21.878 ; v1(16.675,9.7) 17.1,9.7 17.602,9.198 17.602,8.519 16.932,7.848 U1.4 16.129,6.975 16.129,6.576 16.705,6 17.417,6 U1.6@17.74,6.323 ; 17.475,9.325 19.397,9.325 20.03,8.692 21.392,8.692 v1(23,10.3) ; v1(23.4,11.492) 23.97,11.492 24.249,11.771 U1.18@24.32,11.771 ; U1.18 24.71,12.091 25.419,12.8 26.8,12.8 ; v1(28.125,17) 27.525,16.4 27.525,14.493 26.8,13.768 26.8,12.8 ; v1(28.125,19.5) 31.8,19.5 32,19.7 32,20.2 30.775,21.425 U4.4 ; v1(30,12.4) 27.3,12.4 26.9,12.8 26.8,12.8
  Bottom Layer w0.4: v1(4.298,17.547) 4.299,17.548 4.299,19.999 F1.2 ; P1.4 5.205,13.295 7.628,13.295 R7.1 7.898,13.075 10.375,13.075 R10.2 ; 9.1,13.05 9.1,8.724 9.609,8.214 10.286,8.214 R1.1@10.5,8 ; J2.4 9.548,26.972 9.548,25.613 10.06,25.1 10.06,22.64 11.45,21.25 13.408,21.25 13.809,21.651 v1(13.809,21.878) ; U5.18 11.92,13.225 11.795,13.1 R10.2 ; v1(16.675,9.7) 16.277,10.098 16.277,10.555 15.962,10.87 C1.1 15.32,11.1 14.1,11.1 14.095,11.105 13.315,11.105 C2.2 12.98,11.4 11.2,11.4 10.4,12.2 R10.2 ; v1(23,10.3) 23.4,10.7 v1(23.4,11.492) ; v1(28.125,17) v1(28.125,19.5) ; D6.2 33.025,11.85 34.345,10.53 34.345,9.905 35.33,8.92 C5.2
  Bottom Layer w1: D7.2 D6.2
  other v1: 12.1,14.475 30.775,23.3
+5V_F: C4.2 D4.2 F1.1 U2.2 U2.4 | length 42.9
  Top Layer w0.4: v1(18.929,16.6) 18.929,16.529 19.193,16.265 20.088,16.265 20.353,16 v1(20.598,16) ; v1(23,16) 23.775,15.225 23.775,14.476 24.032,14.219 24.581,14.219 v1(24.6,14.2) ; v1(27.875,14) 27.902,14 28.202,13.7 v1(34.825,13.7)
  Top Layer w1: U2.4@7.175,16.85 6.8,17.225 6.8,20.1 7.5,20.8 U2.2
  Bottom Layer w0.4: v1(7.5,16.875) C4.2@8.023,17.398 ; F1.1@8.9,19.25 9.125,19.475 17.932,19.475 18.5,18.907 18.5,17.029 v1(18.929,16.6) ; v1(20.598,16) v1(23,16) ; v1(24.6,14.2) 27.648,14.2 27.848,14 v1(27.875,14) ; v1(34.825,13.7) 34.844,13.681 34.844,13.634 35.366,13.111 35.366,13.07 36.436,12 D4.2
  Bottom Layer w1: v1(8,17.42) 8,17.96 8.9,18.86 8.9,19.25 F1.1
  other v1: 7.3,17.4
+12V: D8.1 J2.1 | length 2.9
  Top Layer w1: J2.1 1.9,24.745 D8.1@2.362,24.282
ADC0: J2.12 U1.23 | length 17.6
  Top Layer w0.35: 22.346,15.454 22.485,15.593 22.485,15.815 21.9,16.4 21.9,18.6 22.129,18.829 22.729,18.829 23.7,19.8 23.7,19.922 23.708,19.93 23.708,21.537 23.7,21.545 23.7,23.655 24.045,24 27.359,24 J2.12@30.359,27
ADC1: J2.11 U1.24 | length 16
  Top Layer w0.35: U1.24 21.599,15.839 21.599,15.945 21.4,16.144 21.4,18.9 21.879,19.379 22.379,19.379 23.158,20.158 23.158,21.309 23.165,21.316 23.165,23.901 23.42,24.157 23.424,24.157 23.817,24.55 26.35,24.55 27.2,25.4
  Top Layer w0.4: 27.2,25.4 27.3,25.5 J2.11
ADC2: J2.10 U1.25 | length 14.1
  Top Layer w0.35: U1.25 19.304,15.375 19.41,15.375 v1(19.8,15.765) ; v1(22.809,24.257) 24.525,25.973 24.525,26.765 J2.10
  Bottom Layer w0.35: v1(19.8,15.765) 19.8,15.8 19.81,15.81 19.81,16.11 20.7,17 20.7,20.156 22.68,22.136 22.68,24.114 22.809,24.243 v1(22.809,24.257)
ADC3: J2.9 U1.26 | length 13.4
  Top Layer w0.35: v1(20.2,19.636) 20.2,24.46 22.22,26.48 J2.9
  Bottom Layer w0.35: v1(18.27,15.247) 20.2,17.177 v1(20.2,19.636)
ADC4: J2.8 U1.27 | length 13.9
  Top Layer w0.35: v1(17.9,18.8) 17.9,23.9 19.68,25.68 J2.8 ; v1(17.925,16.3) 17.45,15.825 17.45,14.967 U1.27
  Bottom Layer w0.35: v1(17.9,18.8) 17.9,17.647 17.875,17.622 17.875,16.364 17.925,16.314 v1(17.925,16.3)
ADC5: J2.7 U1.28 | length 13.7
  Top Layer w0.35: v1(16.9,15.485) 16.9,14.386 U1.28 ; J2.7 17.14,25.473 17.4,25.213 v1(17.4,18.4)
  Bottom Layer w0.35: v1@16.955,15.5 16.955,16.072 17.4,16.517 v1(17.4,18.4)
ADC6: J2.6 U1.19 | length 23.9
  Bottom Layer w0.35: J2.6 14.6,26.8 16.1,25.3 22.01,25.3 22.012,25.298 23.802,25.298 24.3,24.8 24.3,15.2 23.1,14 23.1,12.699 v1(23.5,12.3)
ADC7: J2.5 U1.22 | length 23.3
  Bottom Layer w0.35: J2.5 12.06,26 13.31,24.75 22.238,24.75 22.253,24.765 23.335,24.765 23.7,24.4 23.7,15.695 v1(22.805,14.8)
CANH: J3.4 P3.1 R8.1 U3.7 | length 33.7
  Top Layer w0.35: P3.1 11.54,7.44 12.288,8.188 12.288,9.23 12.3,9.242 12.3,12.236 14.465,14.401 14.465,16.156 14.709,16.4 14.75,16.4 15.135,16.785 U3.7
  Top Layer w0.4: v1(3.7,4.2) 3.7,6.154 4.281,6.735 6.365,6.735 8.3,4.8 9.407,4.8 9.432,4.775 9.85,4.775 10.39,5.315 10.855,5.315 P3.1
  Bottom Layer w0.35: P3.1 13.5,6 R8.1@14,5.5
  Bottom Layer w0.4: v1(3.7,4.2) 5,2.9 8.22,2.9 J3.4
CANL: J3.3 P3.2 R8.2 U3.6 | length 39.8
  Top Layer w0.35: P3.2 9,6.5 11.725,9.225 11.738,9.225 11.738,9.458 11.75,9.47 11.75,11.48 11.738,11.492 11.738,11.758 11.75,11.77 11.75,12.464 13.865,14.579 U3.6
  Top Layer w0.4: v1(3.1,4.534) 3.1,6.966 3.394,7.26 7.74,7.26 P3.2
  Bottom Layer w0.35: P3.2 10.575,4.425 15.125,4.425 15.575,4.875 16.525,4.875 16.875,5.225 R8.2
  Bottom Layer w0.4: v1(3.1,4.534) 3.1,1.1 3.8,0.4 6.139,0.4 6.98,1.241 J3.3
D0/RXD: J3.2 R2.1 U1.30 | length 26.5
  Top Layer w0.35: J3.2 4.44,1.84 v1(6.7,4.1) ; v1(8.9,4.1) 11.697,4.1 12.9,5.303 12.9,11.855 14.585,13.54 15.483,13.54 U1.30 17.123,11.9 17.878,11.9 18.378,11.4 20.037,11.4 20.047,11.39 20.3,11.39 20.69,11 v1(21,11)
  Bottom Layer w0.35: v1(6.7,4.1) v1(8.9,4.1)
D1/TXD: J3.1 R3.1 U1.31 | length 30.6
  Top Layer w0.35: J3.1 1.9,2.463 2.637,3.2 4.9,3.2 6.4,4.7 7.446,4.7 8.546,3.6 12.6,3.6 13.55,4.55 13.55,11.55 14.8,12.8 15.092,12.8 U1.31 16.542,11.35 17.65,11.35 18.15,10.85 19.65,10.85 20.5,10 v1(21.2,10)
D2/INTCAN: J3.5 U1.32 U5.12 | length 24.7
  Top Layer w0.35: J3.5 12.2,1.6 14.1,3.5 14.1,10.39 U1.32 15.511,11.525 16.736,10.3 19.2,10.3 20.258,9.242 21.242,9.242 21.825,9.825 21.825,11.455 21.33,11.95 20.338,11.95 20.328,11.94 20.317,11.95 19.8,11.95 19.5,12.25 v1(19.5,13.6)
D3: J3.6 U1.1 | length 7.7
  Top Layer w0.35: J3.6 14.6,1.666 14.734,1.8 14.734,8.974 U1.1@14.96,9.2
D4: J3.7 U1.2 | length 8.3
  Top Layer w0.35: U1.2 15.284,8.393 15.284,5.107 17.14,3.251 J3.7
D5: J3.8 U1.9 | length 5.3
  Top Layer w0.35: J3.8 19.7,1.6 22.1,4 22.1,4.66 U1.9
D6: J3.9 U1.10 | length 5.4
  Top Layer w0.35: U1.10 23.1,4.792 23.1,2.48 J3.9
D7: J3.10 U1.11 | length 6
  Top Layer w0.35: U1.11 24.225,4.798 24.225,3.603 24.76,3.068 J3.10
D8: J3.11 U1.12 | length 7.5
  Top Layer w0.35: U1.12 27.372,2.782 27.372,1.672 J3.11
D9/CS: J3.12 U1.13 U5.16 | length 28.8
  Top Layer w0.35: U1.13 24.511,6.775 26.165,6.775 29.84,3.1 J3.12
  Bottom Layer w0.35: U5.16 14.46,12.434 15.134,11.76 16.499,11.76 17.15,11.109 17.15,7.65 18.276,6.524 18.276,6.148 19.374,5.05 24.45,5.05 v1(26.1,6.7)
D10: J3.13 U1.14 | length 12.2
  Top Layer w0.35: U1.14 24.917,7.5 26.825,7.5 29.7,4.625 31.274,4.625 32.38,3.519 J3.13
D11/MOSI: J3.14 P1.5 U1.15 U5.14 | length 61.4
  Top Layer w0.35: U1.15 25.373,8.175 27.425,8.175 v1(28.3,7.3) 30.15,5.45 33.225,5.45 34.92,3.755 J3.14
  Bottom Layer w0.35: P1.5 4.96,10.74 6.135,9.565 6.135,5.905 7.34,4.7 9.297,4.7 10.022,3.975 24.975,3.975 v1(28.3,7.3) ; U5.14 17,13.19 17.14,13.05 17.183,13.05 20.7,9.533 20.7,8.484 19.176,6.96 19.176,6.52 19.697,6 23.33,6 v1(25.465,8.135)
D12/MISO: J3.15 P1.1 U1.16 U5.15 | length 55.3
  Top Layer w0.35: U1.16 25.905,8.775 27.875,8.775 30.5,6.15 33.875,6.15 37.46,2.565 J3.15
  Bottom Layer w0.35: U5.15 15.73,13.279 16.509,12.5 16.955,12.5 16.955,12.49 19.826,9.618 19.826,9.237 18.228,7.638 18.228,7.235 18.726,6.737 18.726,6.334 19.56,5.5 23.8,5.5 26.2,7.9 27.64,7.9 v1(28.2,8.46)
  Bottom Layer w0.4: P1.1 3.04,14.16 3.04,15.04 3.9,15.9 10.575,15.9 11.6,16.925 14.882,16.925 15.738,16.069 15.738,13.833 U5.15
D13/SCK: J2.15 P1.2 R4.2 U1.17 U5.13 | length 77.6
  Top Layer w0.35: v1(20.11,12.5) 21.558,12.5 23.195,10.863 24.436,10.863 25.099,11.525 26.575,11.525 27.1,11 ; v1(29.8,8.3) 27.1,11 ; v1(34.4,11.9) 34.39,11.89 34.29,11.89 33.4,11 29.8,11 27.1,11
  Bottom Layer w0.35: P1.2 1,9.58 1,7.819 5.319,3.5 26.5,3.5 30.45,7.45 30.45,7.975 R4.2 30.775,8.3 v1(29.8,8.3) ; U5.13 18.27,13.315 19.095,12.49 19.106,12.5 v1(20.11,12.5) ; v1(34.4,11.9) 34.4,11.914 34.2,12.113 34.2,23.3 37.049,26.149 37.049,26.217 37.46,26.628 J2.15
GND: C1.2 C2.1 C3.1 C4.1 C5.1 C6.1 C7.1 C9.1 C10.1 C11.1 D1.1 J1.0 J1.5 J2.2 J2.13 P1.6 R5.2 R6.1 S1.2 U1.3 U1.5 U1.21 U2.1 U3.2 U4.7 U4.18 U4.21 U4.25 U4.26 U5.9 Y1.2 Y2.2 | length 0.3
  Top Layer w0.4: S1.2@4.7,5.28 S1.2
  other v1: 8.2,0.5 10.8,2.325 33.3,3.982 2.315,4.034 27.144,4.816 17.9,5.2 5,5.8 15.9,5.856 16.955,6.9 18.771,7.468 21.703,7.8 8.89,7.905 16.2,8.095 19.685,8.28 11.641,8.302 23,8.958 14.6,9.7 26.094,10.45 31.496,10.525 34.87,10.688 27.144,11.925 19.05,11.963 22.6,12.23 31.675,13.2 35.8,13.7 35.2,14.455 26.375,14.7 9.023,15.4 30.7,16.275 20.913,16.5 19,18.1 36.5,18.391 11.6,18.7 8,19.3 27,20.261 19.646,20.3 29.591,21.336 16.408,21.464 33.325,23.875 28.423,24.028
NetC3_2: C3.2 U1.20 | length 2.4
  Bottom Layer w0.35: v1(23.875,13.575) 23.889,13.575 23.914,13.6 25.84,13.6 25.905,13.535 C3.2@25.905,13.22
NetC8_1: C8.1 U4.2 | length 14.2
  Top Layer w0.35: C8.1@22.92,17.494 24.326,18.9 32.3,18.9 32.8,19.4 32.8,20.6 32.075,21.325 U4.2
NetC11_2: C11.2 D8.2 U2.3 | length 3.8
  Top Layer w1: D8.2@2.337,21.946 4.801,21.946 5.2,22.345 U2.3
  other v1: 4.978,23.165
NetD1_2: D1.2 R4.1
  other v1: 33.45,8.325
NetD2_1: D2.1 R5.1
  other v1: 2.362,19.514
NetD3_1: D3.1 U3.1 U5.1 | length 18.2
  Top Layer w0.35: D3.1 7.773,13.448 10.175,15.85 10.175,20.089 11.87,21.784 11.87,23.775 v1(11.92,23.825) 11.934,23.825 11.983,23.875 15.901,23.875 16.255,23.52 16.255,22.862 U3.1
NetD3_2: D3.2 R7.2
  other v1: 7.722,10.312
NetD5_1: D5.1 U3.4 U5.2 | length 11.6
  Top Layer w0.35: D5.1@10.698,12.775 10.775,12.852 10.775,19.325 12.595,21.145 U3.4 12.595,23.245 U3.4@12.862,22.979
  other v1: 12.929,22.936
NetD5_2: D5.2 R10.1
  other v1: 10.465,10.389
NetD6_1: D6.1 R11.2 | length 6
  Bottom Layer w0.35: R11.2 32.75,19.5 33.5,18.75 33.5,14.65 D6.1
NetD7_1: D7.1 R12.2 | length 4.2
  Bottom Layer w0.35: D7.1 30.45,14.15 32.6,16.3 R12.2
NetR6_2: R6.2 U3.8 | length 9.9
  Top Layer w0.35: U3.8 17.188,17.288 19.061,19.161 20.961,19.161 22.047,20.247 22.047,22.347 22.35,22.65 R6.2
NetR9_1: R9.1 U5.17 | length 3.4
  Bottom Layer w0.35: U5.17 13.19,14.79 14.1,15.7 v1(15.2,15.7)
NetR11_1: R11.1 U4.23 | length 6.5
  Top Layer w0.35: U4.23 29.5,15.525 29.5,16.377 29.55,16.427 29.55,16.65 29.8,16.9 v1(30.9,16.9)
  Bottom Layer w0.35: R11.1@29.5,19.5 R11.1 30.6,19.5 30.9,19.2 v1(30.9,16.9)
NetR12_1: R12.1 U4.22 | length 1.9
  Top Layer w0.35: U4.22 28.85,15.525 28.85,16.385 29.075,16.61 v1(29.075,16.624)
  Bottom Layer w0.35: v1(29.075,16.624) 29.25,16.624 29.5,16.874 R12.1@29.5,17
NetU1_7: U1.7 Y1.1 | length 3.2
  Top Layer w0.35: v1(18.4,8.7) 19.275,7.825 19.275,6.727 U1.7
NetU1_8: U1.8 Y1.3 | length 2.1
  Top Layer w0.35: U1.8 20.3,6.62 v1(20.3,7.2)
NetU5_7: U5.7 Y2.3 | length 3.2
  Top Layer w0.4: Y2.3 v1(19,20.8)
  Bottom Layer w0.4: v1(19,20.8) 19.2,20.8 19.54,21.14 U5.7
NetU5_8: U5.8 Y2.1 | length 1.7
  Bottom Layer w0.4: U5.8 20.9,23.085 20.9,21.499 v1(20.905,21.495)
RESET: C8.2 J2.3 P1.3 R1.2 S1.1 U1.29 | length 57.2
  Top Layer w0.35: v1(1,12.1) 1,9.88 P1.3 2.42,5.84 S1.1 ; 16.377,13.778 16.3,13.854 16.3,15.6 17.8,17.1 19.54,17.1 19.787,17.347 19.787,17.407 C8.2 ; C8.2@19.88,17.494 C8.2@20.08,17.494
  Top Layer w0.4: P1.3 3.66,9.7 5.9,9.7 7.5,8.1 v1(7.5,7.9)
  Bottom Layer w0.35: v1(1,12.1) 1,23.9 1.9,24.8 6.96,24.8 6.98,24.82 ; J2.3 6.98,24.82 ; v1(19.7,17.5) 19.7,18.9 18.2,20.4 11.4,20.4 6.98,24.82
RXD: R2.2 U4.1 | length 17.7
  Bottom Layer w0.35: R2.2 26.115,11.55 26.215,11.45 27.65,11.45 28.4,12.2 28.4,15.3 28.6,15.5 28.6,20.591 28.809,20.8 32.1,20.8 32.7,21.4 v1(32.7,21.878)
TXD: R3.2 U4.5 | length 19.3
  Top Layer w0.35: U4.5 30.125,21.075 v1(31,20.2)
  Bottom Layer w0.35: R3.2 27.184,9.225 28.85,10.891 28.85,15.114 29.536,15.8 31.2,15.8 31.55,16.15 31.55,19.65 v1(31,20.2)
USBD+: J1.3 U4.15 | length 14
  Top Layer w0.35: U4.15@24.275,14.95 U4.15 24.275,17.268 25.207,18.2 33.764,18.2 34.311,18.747 J1.3
USBD-: J1.2 U4.16 | length 12.9
  Top Layer w0.35: U4.16@24.925,14.95 U4.16 24.925,17.069 25.456,17.6 34.013,17.6 34.509,18.097 J1.2
VUSB: C9.2 C10.2 D4.1 J1.1 | length 13.8
  Top Layer w0.35: J1.1 36.153,17.447 36.4,17.2 v1(36.4,14.2)
  Top Layer w1: C9.2 38.585,6.495 C10.2 38.585,11.674 v1(38.895,11.984)
  Bottom Layer w0.4: v1(36.4,14.2) 36.9,13.7 38.2,13.7 38.734,13.166 38.734,12.119 D4.1
pads on no net: J1.4 U3.5 U4.3 U4.6 U4.8 U4.9 U4.10 U4.11 U4.12 U4.13 U4.14 U4.19 U4.24 U4.27 U4.28 U5.3 U5.4 U5.5 U5.6 U5.10 U5.11

## Polygon pours and split planes (outlines as drawn)
GND on Top Layer "GND_L01_P017" (solid, pour order 17): 0.1,0.1 0.1,28.5 39.9,28.5 39.9,0.1
GND on Bottom Layer "GND_L02_P020" (solid, pour order 20): 0.1,0.1 0.1,28.5 39.9,28.5 39.9,0.1

## Silkscreen, mask and mechanical layers (free items; w line width, h text height)
Top Overlay:
  drawing of 3058 lines, arcs and shapes, not listed
  text "VIN" at 1.499,24.816 h1.2
  text "5V" at 5.1,15.1 h0.5
  text "RST" at 2,6.6 h0.5
  text "GND" at 4.5,6.6 h0.5
Bottom Overlay:
  drawing of 14 lines, arcs and shapes, not listed
  text "GND" at 5.2,24.908 h0.75
  text "RESET" at 8.1,24.908 h0.75
  text "+5V" at 10.1,24.908 h0.75
  text "ADC7" at 13,24.908 h0.75
  text "ADC6" at 15.4,24.908 h0.75
  text "ADC5" at 18,24.908 h0.75
  text "ADC4" at 20.6,24.908 h0.75
  text "ADC3" at 23.2,24.908 h0.75
  text "ADC2" at 25.6,24.908 h0.75
  text "ADC1" at 28.1,24.908 h0.75
  text "ADC0" at 30.7,24.908 h0.75
  text "GND" at 33.1,24.908 h0.75
  text "+3.3V" at 35.8,24.908 h0.75
  text "D13/SCK" at 38.9,24.908 h0.75
  text "+12V" at 3,24.9 h0.75
  text "Canduino V2 / Akshdeep M" at 24.5,4.1 h1.2
  text "D1/TXD" at 2.9,3.208 h0.75
  text "D0/RXD" at 5.6,3.208 h0.75
  text "CANL" at 7.8,3.208 h0.75
  text "CANH" at 10.4,3.208 h0.75
  text "D2/ / INTCAN" at 13.7,3.2 h0.75
  text "D3" at 15,3.208 h0.75
  text "D4" at 17.5,3.2 h0.75
  text "D5" at 20.1,3.208 h0.75
  text "D6" at 22.6,3.208 h0.75
  text "D7" at 25.1,3.2 h0.75
  text "D8" at 27.8,3.208 h0.75
  text "D9/CS" at 30.7,3.208 h0.75
  text "D10" at 32.9,3.208 h0.75
  text "D11/MOSI" at 36.4,3.208 h0.75
  text "D12/MISO" at 39.8,3.208 h0.75